# Altium PCB BoardC.PcbDoc
Units mil, origin at the board's own origin, x right, y up, seen from the top; angles counter-clockwise.
Board outline 1279.53 x 1279.53 mil, 2 copper layers (Top Layer, Bottom Layer), stack 61.756 mil thick; 19 components, 10 nets, 47 pads, 32 vias.
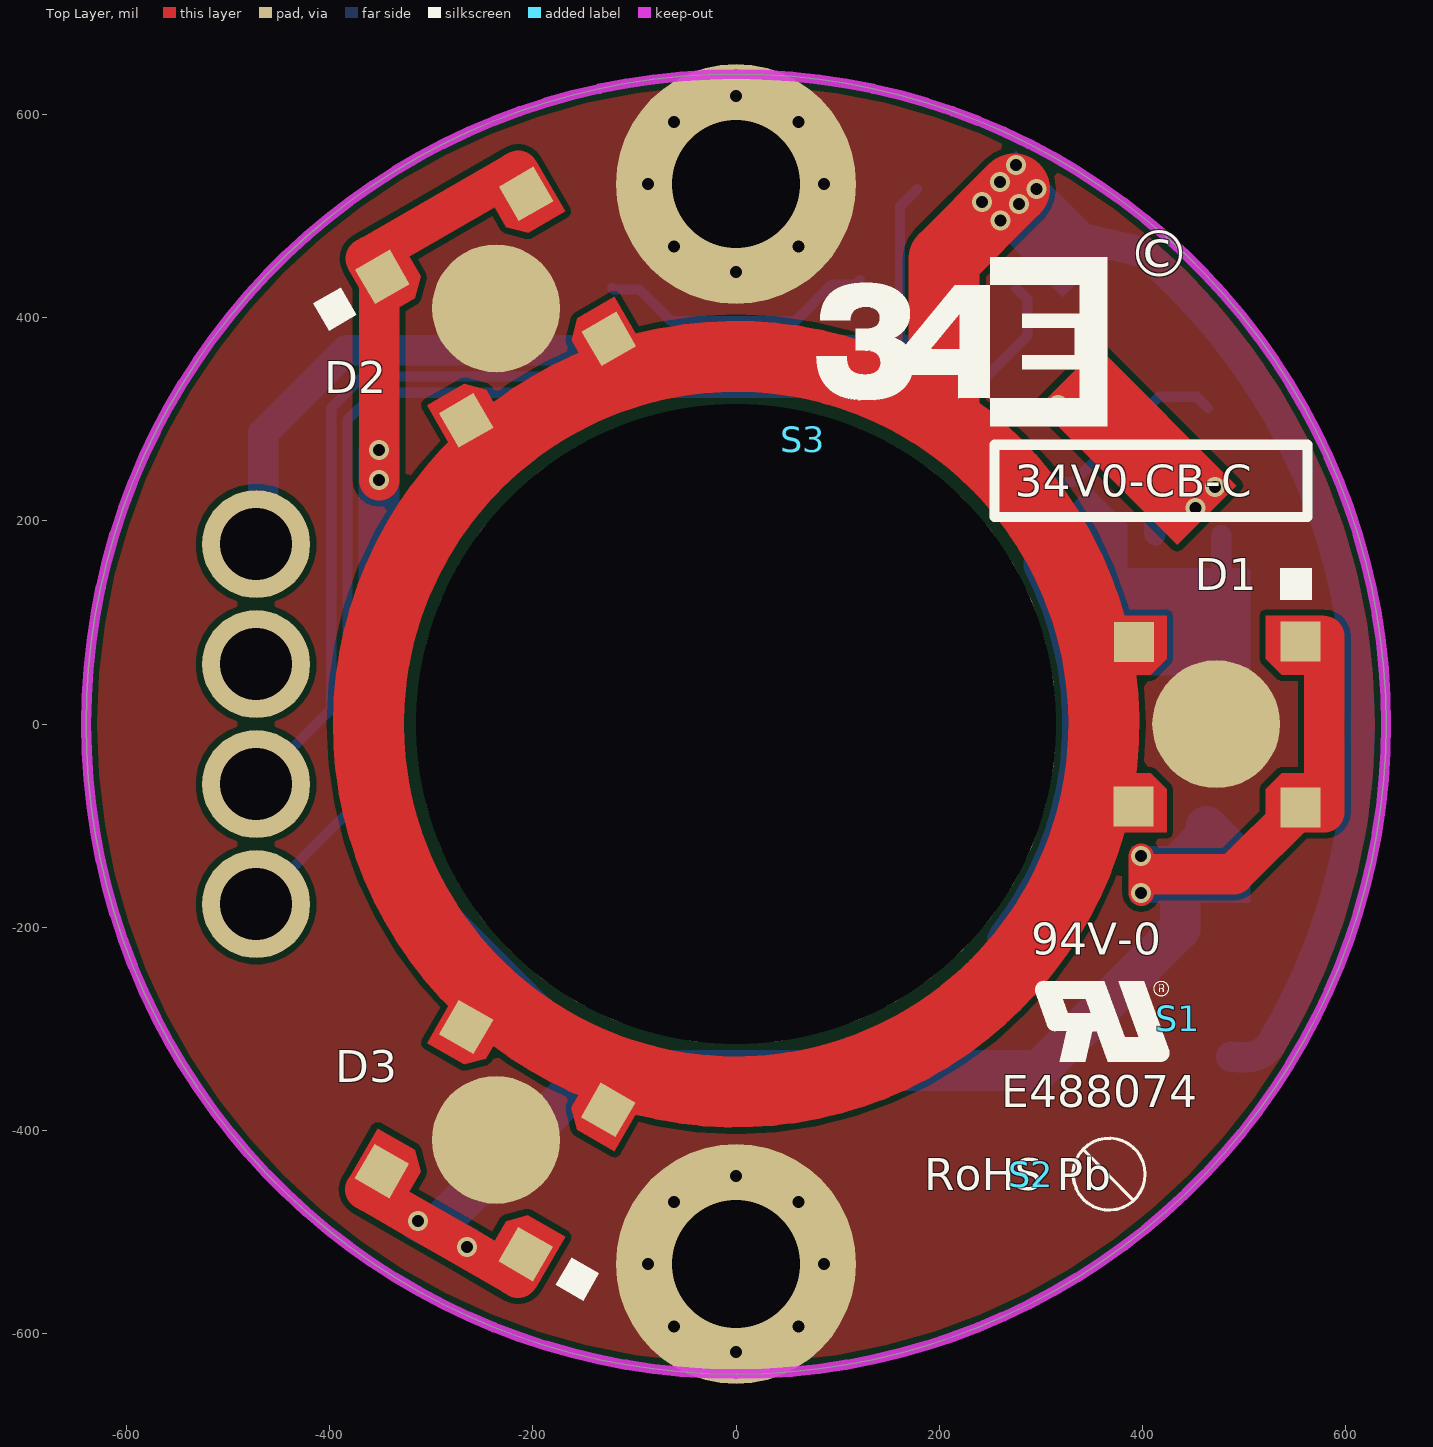
[diagram p0: Top Layer view]
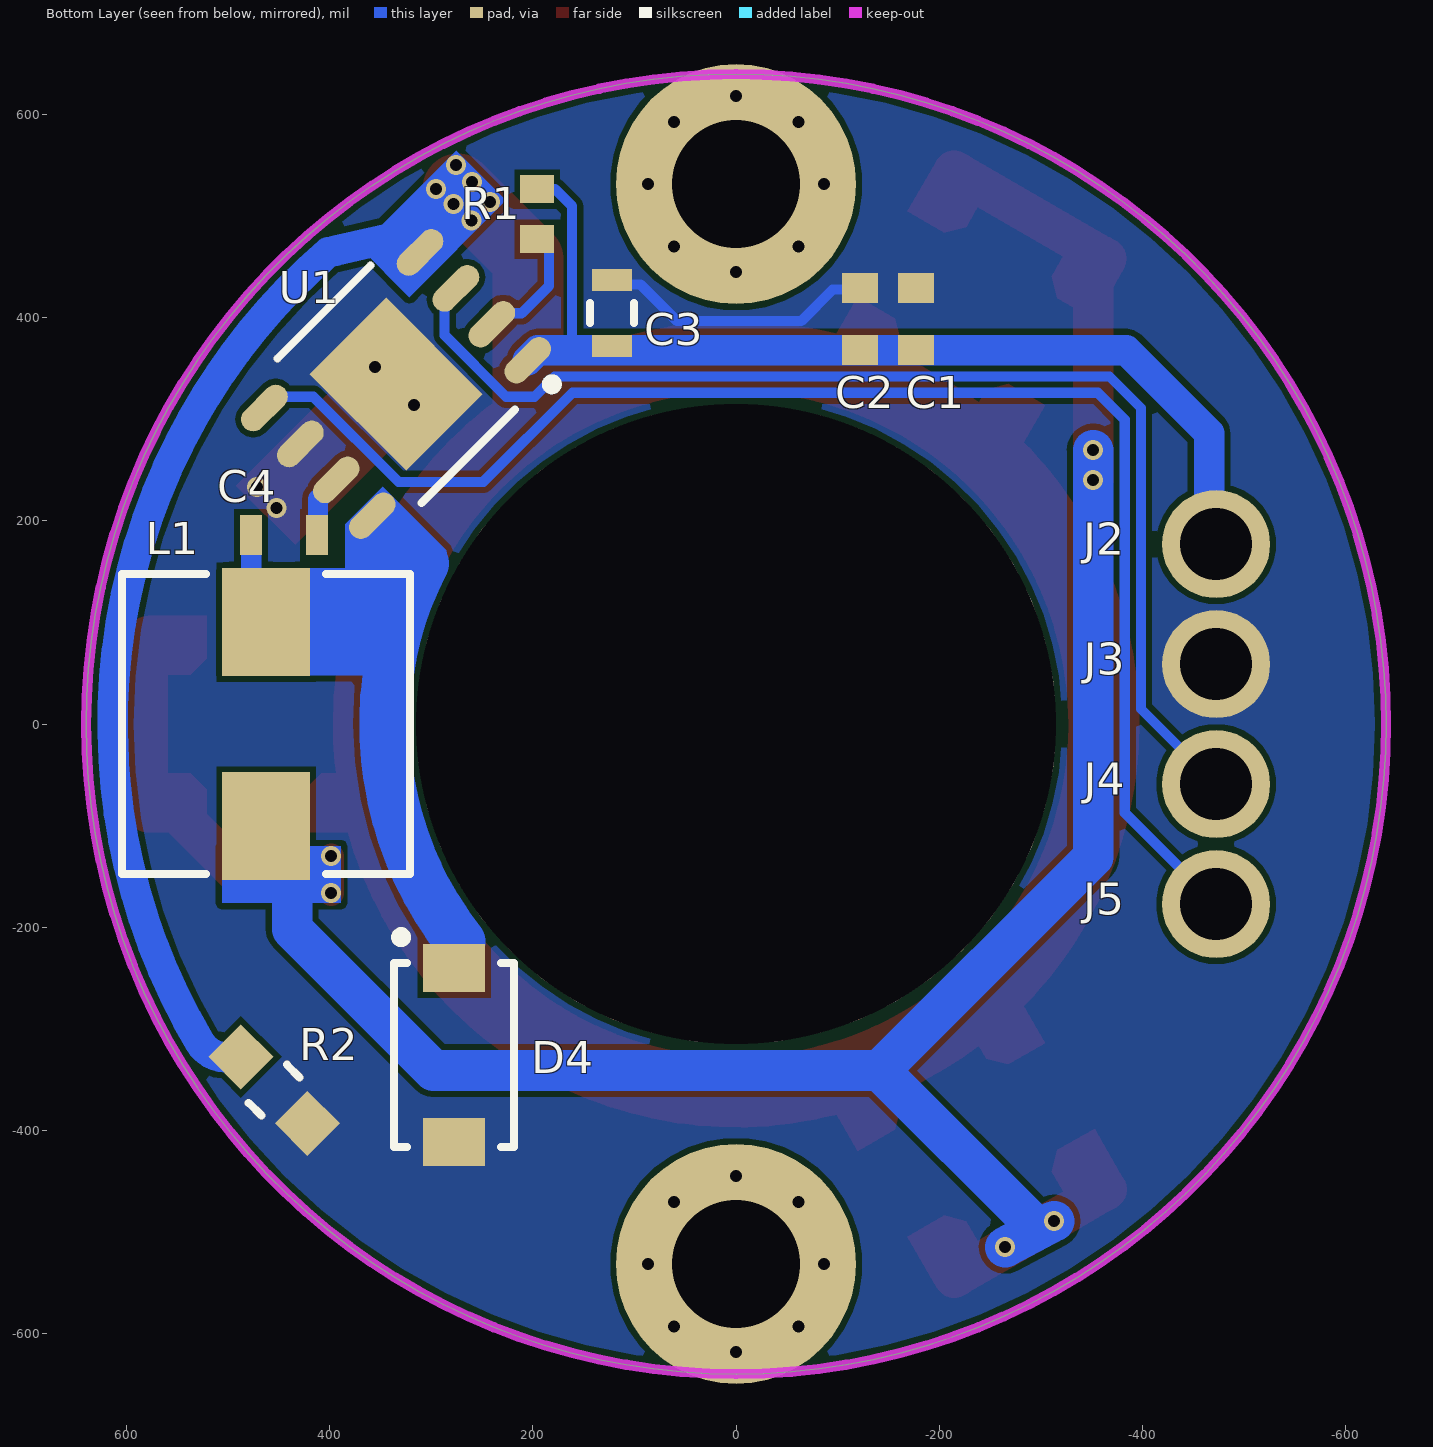
[diagram p1: Bottom Layer view, seen from below]
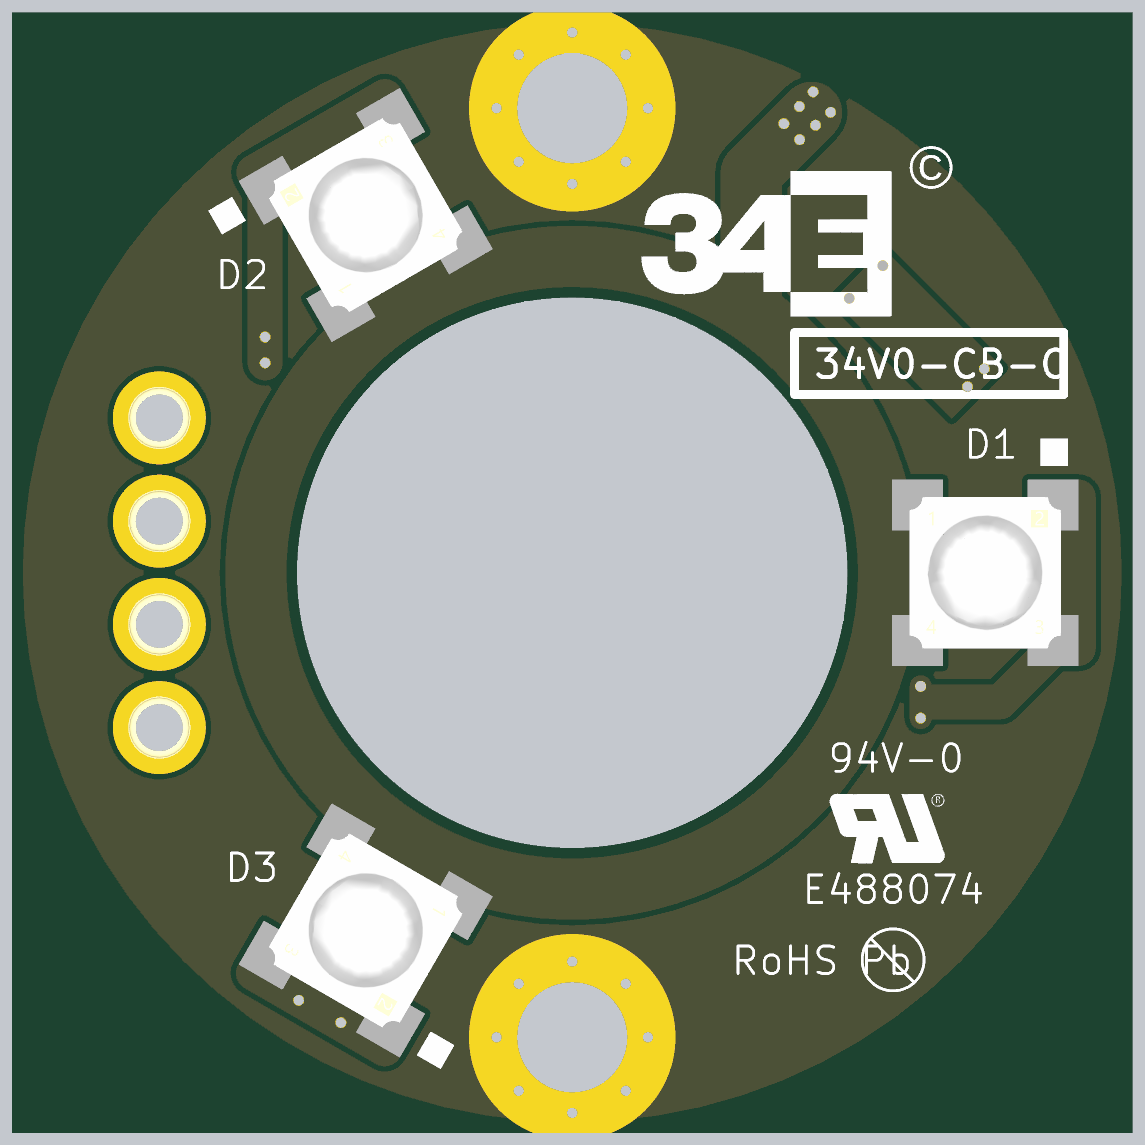
[diagram p2: 3D render of the assembled board from above, using the file's embedded part models]
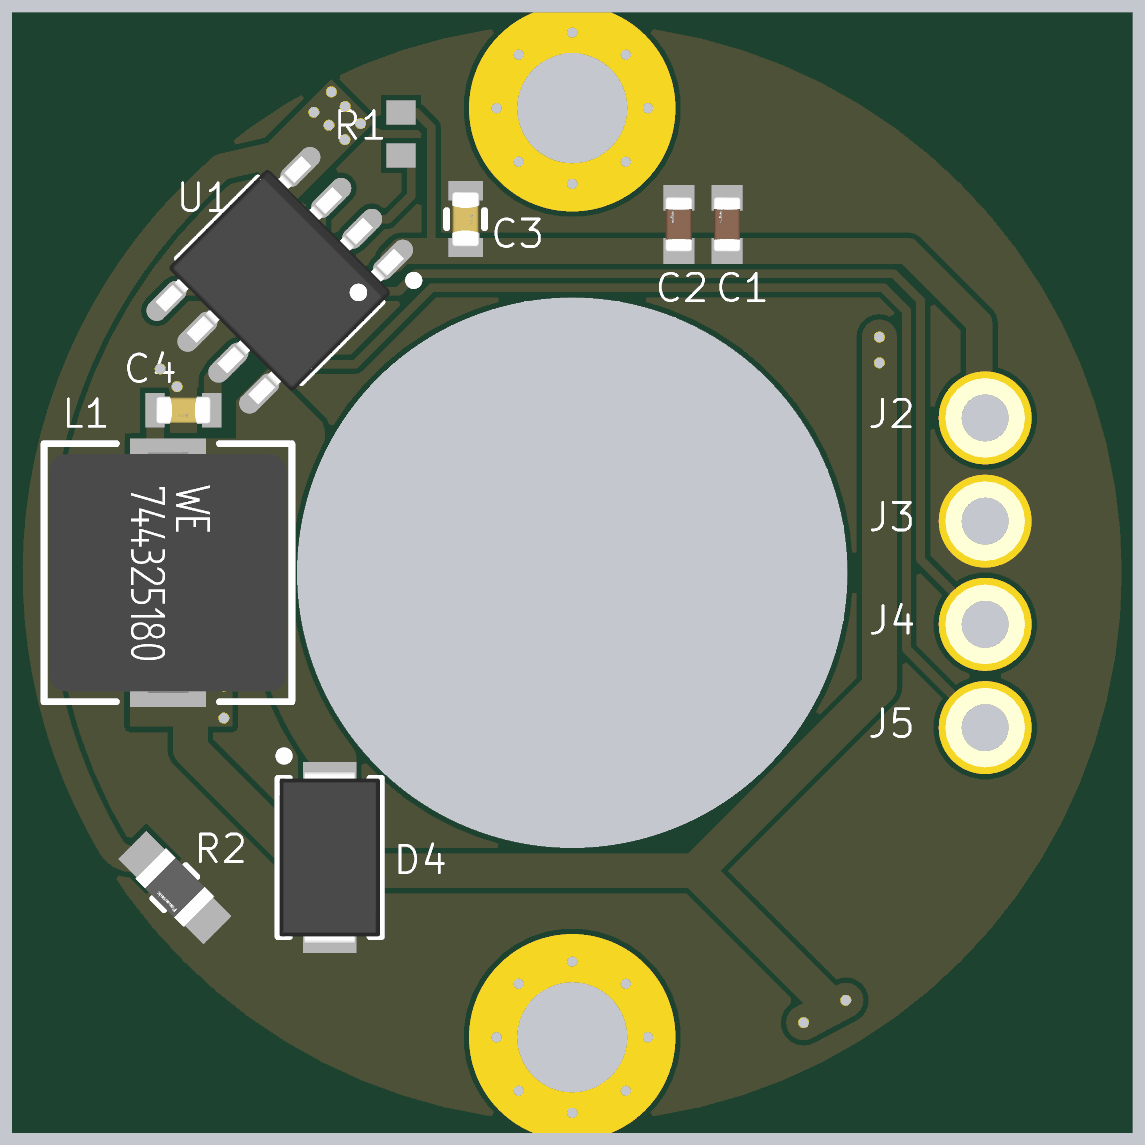
[diagram p3: 3D render of the assembled board from below, using the file's embedded part models]

## Layer stack, top to bottom
Top Solder: solder mask 1, SM-001, Dk 4
Top Layer: signal copper 1.378
Dielectric 1: core 59, Core-043, Dk 4.3
Bottom Layer: signal copper 1.378
Bottom Solder: solder mask 1, SM-001, Dk 4

## Board outline
0,-639.76 cw(c0,0) -639.76,0 cw(c0,0) 0,639.76 cw(c0,0) 639.76,0 cw(c0,0)

## Design rules (kind name [scope] priority, off if disabled: settings)
BoardOutlineClearance BoardOutlineClearance_Polygon [IsPolygon] p1: gap=9.84 ignorepadtopadclearanceinfootprint=FALSE
Clearance [All] p1: gap=6 ignorepadtopadclearanceinfootprint=FALSE except(8: SMDPad-SMDPad)
HoleSize [All] p1: absolutevalues=TRUE maxlimit=10000 minlimit=1 maxpercent=80.000 minpercent=20.000
MinimumSolderMaskSliver [All] p1: minsoldermaskwidth=5
PlaneClearance [All] p1: clearance=8
PlaneConnect [All] p1: planeconnectstyle=Direct reliefexpansion=20 reliefentries=4 reliefconductorwidth=10 reliefairgap=10
PolygonConnect [All] p1: connectstyle=Direct reliefconductorwidth=10 reliefentries=4 polygonreliefangle="90 Angle" airgapwidth=10
RoutingVias [All] p1: holewidth=28 width=50 viastyle="Through Hole" minholewidth=28 minwidth=50 maxholewidth=28 maxwidth=50
SilkToSilkClearance [All] p1: silktosilkclearance=0
SilkToSolderMaskClearance [IsPad] p1: minsilkscreentomaskgap=6 clearancetoexposedcopper=TRUE
SolderMaskExpansion SolderMaskExpansion_Via [Isvia] p1: expansion=4 istentingtop=TRUE
SolderMaskExpansion [Not Isvia] p2: expansion=2 istentingtop=FALSE
Width [All] p1: maxlimit=500 minlimit=10 preferedwidth=10 minimp=50.000000 maximp=50.000000 favimp=50.000000
24 further rules are at their usual default settings.

## Components (designator, comment, footprint, x,y, rotation, side; value= is the part's Value field where it differs from the comment)
C1 "10uF" FP-GRM188-0_2-MFG -177.17,398.62 r90 bottom
C2 "10uF" FP-GRM188-0_2-MFG -121.89,398.62 r90 bottom
C3 "100nF" FP-CGA3E-0_3-0_1-IPC_C 122.05,404.53 r270 bottom
C4 "100nF" FP-CGA3E-0_3-0_1-IPC_C 444.88,186.02 r0 bottom
D1 "LZ1-00R702-0000" LZ1-00R702-0000 472.56,0 r0 top locked
D2 "LZ1-00R702-0000" LZ1-00R702-0000 -236.26,409.25 r120 top locked
D3 "LZ1-00R702-0000" LZ1-00R702-0000 -236.3,-409.25 r240 top locked
D4 "B340AE-13" B340AE-13 277.56,-325.79 r90 bottom
J2 "7406-0-15-15-18-27-10-0" 7406-0-15-15-18-27-10-0 -472.44,177.17 r180 bottom locked
J3 "7406-0-15-15-18-27-10-0" 7406-0-15-15-18-27-10-0 -472.44,59.06 r180 bottom locked
J4 "7406-0-15-15-18-27-10-0" 7406-0-15-15-18-27-10-0 -472.44,-59.06 r180 bottom locked
J5 "7406-0-15-15-18-27-10-0" 7406-0-15-15-18-27-10-0 -472.44,-177.17 r180 bottom locked
L1 "744314101" WE-HCI-7050 462.6,0 r270 bottom locked
R1 "430k 1%" RESC1608X55X30LL15T15 195.87,501.97 r90 bottom
R2 "100m" FP-ERJ6D-MFG 454.72,-360.24 r45 bottom
S1 "" UL 435.04,-289.37 r0 top
S2 "" RoHS 290.35,-442.91 r0 top
S3 "" 34EngineeringLogo 65.94,280.51 r0 top
U1 "IS32LT3954-GRLA3-TR" IS32LT3954-GRLA3-TR 334.65,334.65 r315 bottom locked

## Footprints (in the part's own frame and the unit in brackets; to place one, negate y for a bottom-side part, rotate by r counter-clockwise, add the part's x,y. Pads: shape width x height; smd on the part's side, far side on the other; paste and mask are expansions set on the pad)
34EngineeringLogo [mil]
  silkscreen extent 13,13 299,179
7406-0-15-15-18-27-10-0 [mm]
  round 2.7 hole 1.803: 1(0,0)
  body extent -1.15,-1.16 1.15,1.15, height 0.7
B340AE-13 [mm] "Molded Diode, 2-Leads, Body 4.30x2.61mm, IPC Medium Density"
  rect 1.2x1.55 smd: A(-2.175,0) C(2.175,0)
  silkscreen extent -2.3,-1.5 3.07,1.5, body extent -2.52,-1.46 2.52,1.46, height 2.4
FP-CGA3E-0_3-0_1-IPC_C [mm]
  rect 0.556x1.006 smd paste+0 mask+0: 1(-0.825,0) 2(0.825,0)
  silkscreen extent -0.25,-0.55 0.25,0.55, body extent -0.8,-0.4 0.8,0.4, height 1.1
FP-ERJ6D-MFG [mm]
  rect 1.15x1.15 smd paste+0 mask+0: 1(-1.175,0) 2(1.175,0)
  silkscreen extent -0.23,-0.68 0.23,0.68, body extent -1,-0.62 1,0.62, height 0.7
FP-GRM188-0_2-MFG [mm]
  rect 0.75x0.9 smd paste+0 mask+0: 1(-0.775,0) 2(0.775,0)
  body extent -0.8,-0.4 0.8,0.4, height 1
IS32LT3954-GRLA3-TR [mm] "SOIC, 8-Leads, Body 4.90x3.90mm, Pitch 1.27mm, Thermal Pad 3.41x2.71mm, IPC Medium Density"
  oval 1.4x0.6 smd: 1(-2.75,1.905) 2(-2.75,0.635) 3(-2.75,-0.635) 4(-2.75,-1.905) 5(2.75,-1.905) 6(2.75,-0.635) 7(2.75,0.635) 8(2.75,1.905)
  rect 2.71x3.41 smd: 9(0,0)
  silkscreen extent -2.87,-2.55 1.65,2.88, body extent -3,-2.55 3,2.55, height 1.7
LZ1-00R702-0000 [mm]
  rect 1x1 smd paste+0 mask+0: 1(-2.05,2.05) 2(2.103,2.068) 3(2.103,-2.082) 4(-2.072,-2.057)
  round 3.2 smd: 5(0,0)
  Top Layer region: -2.704,-2.704 -2.704,-1.234 -1.634,-1.234 -1.234,-1.634 -1.234,-2.704
  Top Layer region: 2.704,2.704 2.704,1.234 1.634,1.234 1.234,1.634 1.234,2.704
  Top Layer region: 2.704,-2.704 1.234,-2.704 1.234,-1.634 1.634,-1.234 2.704,-1.234
  Top Layer region: -2.704,2.704 -1.234,2.704 -1.234,1.634 -1.634,1.234 -2.704,1.234
  silkscreen extent 1.6,3.1 2.4,3.9, body extent -2.2,-2.2 2.2,2.2, height 2.4
RESC1608X55X30LL15T15 [mm] "Chip Resistor, 2-Leads, Body 1.60x0.80mm, IPC High Density"
  rect 0.7x0.85 smd: 1(-0.625,0) 2(0.625,0)
  body extent -0.87,-0.48 0.87,0.48, height 0.55
RoHS [mil]
  silkscreen extent 41,-35 112,35
UL [mil]
  silkscreen extent -141,-43 -9,37
WE-HCI-7050 [mm] "SMD Inductor, 2-Leads, Body 7.0 x 6.9 mm"
  rect 2.7x2.2 smd: 1(-2.55,0) 2(2.55,0)
  silkscreen extent -3.75,-3.6 3.75,3.6, body extent -3.5,-3.45 3.5,3.45, height 4.98

## Part data
C1 C2: library part CMP-2006-02520-2, "Chip Multilayer Ceramic Capacitors for General Purpose, 0603, 10uF, X5R, 15%, 20%, 25V", Case Code (Imperial)=0603, Case Code (Metric)=1608, Dielectric=X5R, Max Operating Temperature=85°C, Min Operating Temperature=-55°C, Package Quantity=1, Resistor Type=Ceramic, Tolerance=20%, Voltage=25V, Capacitance=10uF, Case/Package=0603, Depth=0.8mm, Height=0.8mm, Lead Free="Lead Free", Length=1.6mm, Mount="Surface Mount", Number of Pins=2, Packaging="Tape and Reel", REACH SVHC="No SVHC", Termination=SMD/SMT, Thickness=0.031inch, Voltage Rating=25V, Voltage Rating (DC)=25V, Weight=0.000222oz, Width=0.031inch
C3 C4: library part CMP-2000-07546-2, "Cap Ceramic 100nF 50V X7R 10% Pad SMD 0603 +125°C Automotive T/R", Case Code (Imperial)=0603, Case Code (Metric)=1608, Dielectric=X7R, Max Operating Temperature=125°C, Min Operating Temperature=-55°C, Package Quantity=1, Ratings=AEC-Q200, Tolerance=10%, Voltage=50V, Capacitance=100nF, Case/Package=0603, Composition=Ceramic, Depth=0.8mm, Height=0.8mm, Lead Free="Lead Free", Length=1.6mm, Mount="Surface Mount", Packaging="Tape and Reel", Radiation Hardening=No, REACH SVHC="No SVHC", Termination=SMD/SMT, Thickness=0.035inch, Voltage Rating=50V, Voltage Rating (DC)=50V, Weight=7.1E-05oz, Width=0.8mm
D1 D2 D3: "IR Emitter 940nm 1600mW 1200mA 3.05V 4-Pin CSMD T/R", Case/Package=SMD/SMT, Forward Voltage=3V, Manufacturer="LED Engin", ComponentLink1Description=http://www.ledengin.com/files/products/LZ1/LZ1-00R702.pdf?src-supplier=Digi-Key, ComponentLink1URL=http://www.ledengin.com/files/products/LZ1/LZ1-00R702.pdf?src-supplier=Digi-Key, Manufacturer Part Number=LZ1-00R702-0000, Mount="Surface Mount", Orientation="Top View", Packaging="Tape and Reel", RoHS=Yes, Supplier 1="Arrow Electronics", Supplier Part Number 1=LZ1-00R702-0000, Touchscreen="Infrared (IR)", Viewing Angle=90°, Wavelength=940nm
D4: "Rectifier Diode Schottky 40V 3A 2-Pin SMA T/R", Average Rectified Current=2A, Case/Package=SMA, Manufacturer=Diodes, Max Reverse Voltage (DC)=40V, Supplier Part Number 1=07AH3680, Category="Rectifier Diodes", ComponentLink1Description=https://www.diodes.com/assets/Datasheets/B320AE-B345AE.pdf?src-supplier=Digi-Key, ComponentLink1URL=https://www.diodes.com/assets/Datasheets/B320AE-B345AE.pdf?src-supplier=Digi-Key, Manufacturer Part Number=B340AE-13, Mount="Surface Mount", Packaging="Tape and Reel", Pricing 1="1=0.56000, 5=0.56000, 10=0.46300, 25=0.41400, 50=0.36500, 100=0.31600, 250=0.27700, 500=0.23700, 1000=0.17800 (USD)", RoHS=Yes, RoHS Compliant=Yes, Stock 1=4255, Supplier 1=Newark
J2 J3 J4 J5: "3.05 mm PCB Through Hole Pin Receptacle for (0.94 to 1.09 mm Pin) w/ No Tail", Current Rating=8A, Manufacturer=Mill-Max, Package Quantity=500, Category=Terminals, ComponentLink1Description=https://datasheet.ciiva.com/12487/7406-0-15-15-18-27-10-0-72490-12487100.pdf?src-supplier=Mouser, ComponentLink1URL=https://datasheet.ciiva.com/12487/7406-0-15-15-18-27-10-0-72490-12487100.pdf?src-supplier=Mouser, Hole Diameter=1.8mm, Lead Free="Contains Lead", Length=0.12inch, Manufacturer Part Number=7406-0-15-15-18-27-10-0, Material="BERYLLIUM COPPER ALLOY", Mount="Through Hole", Outside Diameter=2.31mm, Packaging=Bulk, Plating=Gold, Pricing 1="1=0.49460, 10=0.42540 (USD)", RoHS=Yes, RoHS Compliant=Yes, Stock 1=1000, Supplier 1="Arrow Electronics", Supplier Part Number 1=7406-0-15-15-18-27-10-0, Termination=Solder
L1: library part CMP-0226-00077-1, "SMD Flat Wire High Current Inductor WE-HCI, L=10.0 µH", Inductance="10.0 ÂµH", ComponentLink1Description="Manufacturer Link", ComponentLink1URL=http://www.we-online.com, ComponentLink2Description=Datasheet, ComponentLink2URL=http://www.we-online.de/katalog/media/pdf/744314101.pdf, DatasheetVersion="ver 1, Aug-2009", PackageDescription="SMD Inductor, 2-Leads, Body 7.0 x 6.9 mm", PackageReference=WE-HCI-7050, PackageVersion=2008
R1: library part CMP-2000-00500-1, Manufacturer=Panasonic, Part Number=ERJ-3EKF4303V
R2: library part CMP-05422-000098-1, "RES 0.1 OHM 1% 1/2W 0805", Case Code (Imperial)=0805, Case Code (Metric)=2012, Max Operating Temperature=155°C, Max Power Dissipation=500mW, Min Operating Temperature=-55°C, Resistance=100mR, Resistor Type="Thick Film", Temperature Coefficient=150ppm/°C, Tolerance=1%, Case/Package=0805, Features="Automotive AEC-Q200", Height=0.028inch, Length=0.079inch, Number of Terminations=2, Packaging="Cut Tape", Width=0.049inch
S1: library part UL
S2: library part RoHS
S3: library part 34EngineeringLogo, "34 Engineering Silkscreen Logo"
U1: "3.0A Dimmable Buck Switching Regulator with Fault Reporting, Spread Spectrum, SOP-8-EP", Manufacturer=ISSI, Supplier Part Number 1=2521-IS32LT3954-GRLA3-TRCT-ND, Manufacturer Part Number=IS32LT3954-GRLA3-TR, Pricing 1="1=1.94000, 10=1.74200, 25=1.64320, 100=1.39980, 250=1.31440, 500=1.15010, 1000=0.95294 (USD)", RoHS=Yes, RoHS Compliant=Yes, Stock 1=27850, Supplier 1=Digi-Key

## Free pads (board coordinates)
  round 236.22 hole 125.98 unplated: 1(0,-531.5) 1(0,531.5)
  round 629.92 hole 629.92 unplated: 1(0,0)

## Via types
v1: diameter 19.68, hole 11.81, Top Layer to Bottom Layer, tented both sides, 32 vias

## Nets (pads, with @x,y where several pads share a name; then routed paths per layer and width w, separated by ;. In a path a pad name is that pad's centre, name@x,y a point inside that pad or via, vN(x,y) a via of type N, cw(c..) or ccw(c..) an arc to the next point about the centre after c; other vN are vias at no path point)
+12: C1.1 C2.1 C3.2 J2.1 R1.2 U1.1 | length 1036.3
  Bottom Layer w10: -250,370.08 -248.03,368.11 ; C3.2@107.97,369.39 C3.2@109.25,368.11 ; C3.2 155.56,372.05 161.42,377.91 161.42,509.84 178.15,526.57
  Bottom Layer w30: J2.1@-465.55,160.71 -465.55,286.42 -383.86,368.11 -248.03,368.11 109.25,368.11 138.78,368.11 152.85,368.11 195.12,368.11 U1.1
ENC: D1.5 D2.5 D3.5 pad.1@0,531.5 pad.1@0,-531.5
  other v1: 0,-618.11 -61.25,-592.74 61.25,-592.74 -86.61,-531.5 86.61,-531.5 -61.25,-470.25 61.25,-470.25 0,-444.88 0,444.88 -61.25,470.25 61.25,470.25 -86.61,531.5 86.61,531.5 -61.25,592.74 61.25,592.74 0,618.11
GND: C1.2 C2.2 C3.1 D4.A J3.1 R2.1 U1.6 U1.9 | length 274.1
  Bottom Layer w10: C2.2 -120.46,427.71 -95.03,427.71 -63.98,396.65 58.07,396.65 94.25,432.83 117.87,432.83 C3.1
  other v1: 452.21,212.86 471.46,233.27 316.93,313.98 355.31,351.38
LED_A: D1.2 D1.3 D2.2 D2.3 D3.2 D3.3 L1.2 | length 2671.6
  Top Layer w25: v1(398.62,-166.34) v1(398.62,-129.92)
  Top Layer w40: -364.78,-458 -360.53,-460.45 -312.44,-488.22 -265.19,-515.5 -219.03,-542.15 -214.64,-544.68 ; -364.3,458.25 -359.98,460.75 -218.49,542.44 -214.43,544.78 ; v1(-351.38,240.16) v1(-351.38,269.68) -351.38,437.01 D2.2 ; 409.43,-147.68 489.65,-147.68 D1.3 ; 578.98,-86.64 578.98,86.61
  Bottom Layer w40: v1(-351.38,269.68) -351.45,269.61 -351.45,-130.74 -141.23,-340.96 ; v1(-312.99,-489.17) v1(-264.76,-514.76) ; -303.15,-493.11 -293.38,-493.11 -141.23,-340.96 ; L1.2@437.01,-148.46 437.01,-201.77 297.82,-340.96 -141.23,-340.96 ; L1.2@439.29,-133.54 462.6,-110.24 L1.2 L1.2@485.02,-122.81
LED_BOOT: C4.1 U1.7 | length 62.2
  Bottom Layer w20: U1.7 393.52,239.43 411.45,221.5 411.45,186.97 C4.1
LED_C: D1.1 D1.4 D2.1 D2.4 D3.1 D3.4 R2.2 U1.4 | length 3503.7
  Top Layer w70: 204.72,312.81 204.72,457.68 273.8,526.76 ; 354.15,74.99 ccw(c0,0) 355.64,67.55
  Bottom Layer w30: 310.53,485.24 393.96,466.07 401.32,464.38 cw(c0,0) 527.82,-313.23 cw(c502.04,-297.88) 502.6,-327.87 cw(c499.8,-177.63) R2.2@487.45,-327.39
  other v1: 260.22,495.56 278.35,512.04 242.13,513.78 295.57,526.87 259.84,533.46 275.59,550.2
LED_FAULT: J5.1 U1.5 | length 1447.4
  Bottom Layer w10: J5.1 -382.45,-87.17 -382.45,299.64 -355.98,326.11 161.09,326.11 248.75,238.46 332.29,238.46 416.09,322.26 453.1,322.26 U1.5
LED_LX: C4.2 D4.C L1.1 U1.8 | length 486.8
  Bottom Layer w20: L1.1 477.36,115.16 C4.2
  Bottom Layer w50: 271.75,-214.11 ccw(c0,0) 307.71,158.13
LED_PWM: J4.1 U1.3 | length 1183.2
  Bottom Layer w10: J4.1 -398.45,14.94 -398.45,311.2 -367.54,342.11 178.56,342.11 198.45,322.22 226.47,322.22 286.9,382.66 286.9,417.74 U1.3
LED_TON: R1.1 U1.2 | length 111.7
  Bottom Layer w10: R1.1@184.34,471.17 184.34,431.13 211.08,404.38 229.55,404.38 U1.2

## Polygon pours and split planes (outlines as drawn)
ENC on Top Layer "Top ENC Pour" (solid, pour order 2): -800,800 800,800 800,-800 -800,-800
GND on Bottom Layer "Bottom GND Pour" (solid, pour order 1): -800,800 800,800 800,-800 -800,-800

## Keep-outs
Keep-Out Layer:
  the board outline again, w10

## Other copper
Top Layer:
  region net GND: 434.06,176.18 492.62,234.74 356.3,371.06 297.74,312.5
Bottom Layer:
  rectangle net LED_A: 388.78,-176.18 506.11,-120.08
  region net LED_C: 321.6,420.03 370.91,469.34 275.54,564.72 226.23,515.41
  region net LED_LX: 384.84,196.85 347.93,233.76 285.13,170.96 284.03,160.36 308.07,116.14 325.51,48.23 505.91,48.23 505.91,151.57 503.94,153.54 384.84,153.54

## Silkscreen, mask and mechanical layers (free items; w line width, h text height)
Top Overlay:
  lines w10: 254.4,203.92 562.4,203.92 562.4,274.92 254.4,274.92 254.4,203.92
  text "34V0-CB-C" at 274.13,223.65 h31.5
Mechanical 1:
  the board outline again, w10

## Text inside footprints (layer, text, board x,y; h text height)
S1: Top Overlay "94V-0" at 290.55,-227.17 h31.5; Top Overlay "E488074" at 261.02,-377.16 h31.5
S2: Top Overlay "RoHS Pb" at 185.4,-458.66 h31.5
S3: Top Overlay "©" at 385.01,425.18 h78.74